# Altium PCB Micromouse_1_2.PcbDoc (part 2 of 2)
Units mm, origin at the board's own origin, x right, y up, seen from the top; angles counter-clockwise.
Board outline 75.15 x 101.5 mm, 2 copper layers (Top Layer, Bottom Layer); 116 components, 82 nets, 352 pads, 175 vias.
Unrouted connection lines stored in the file: 17.
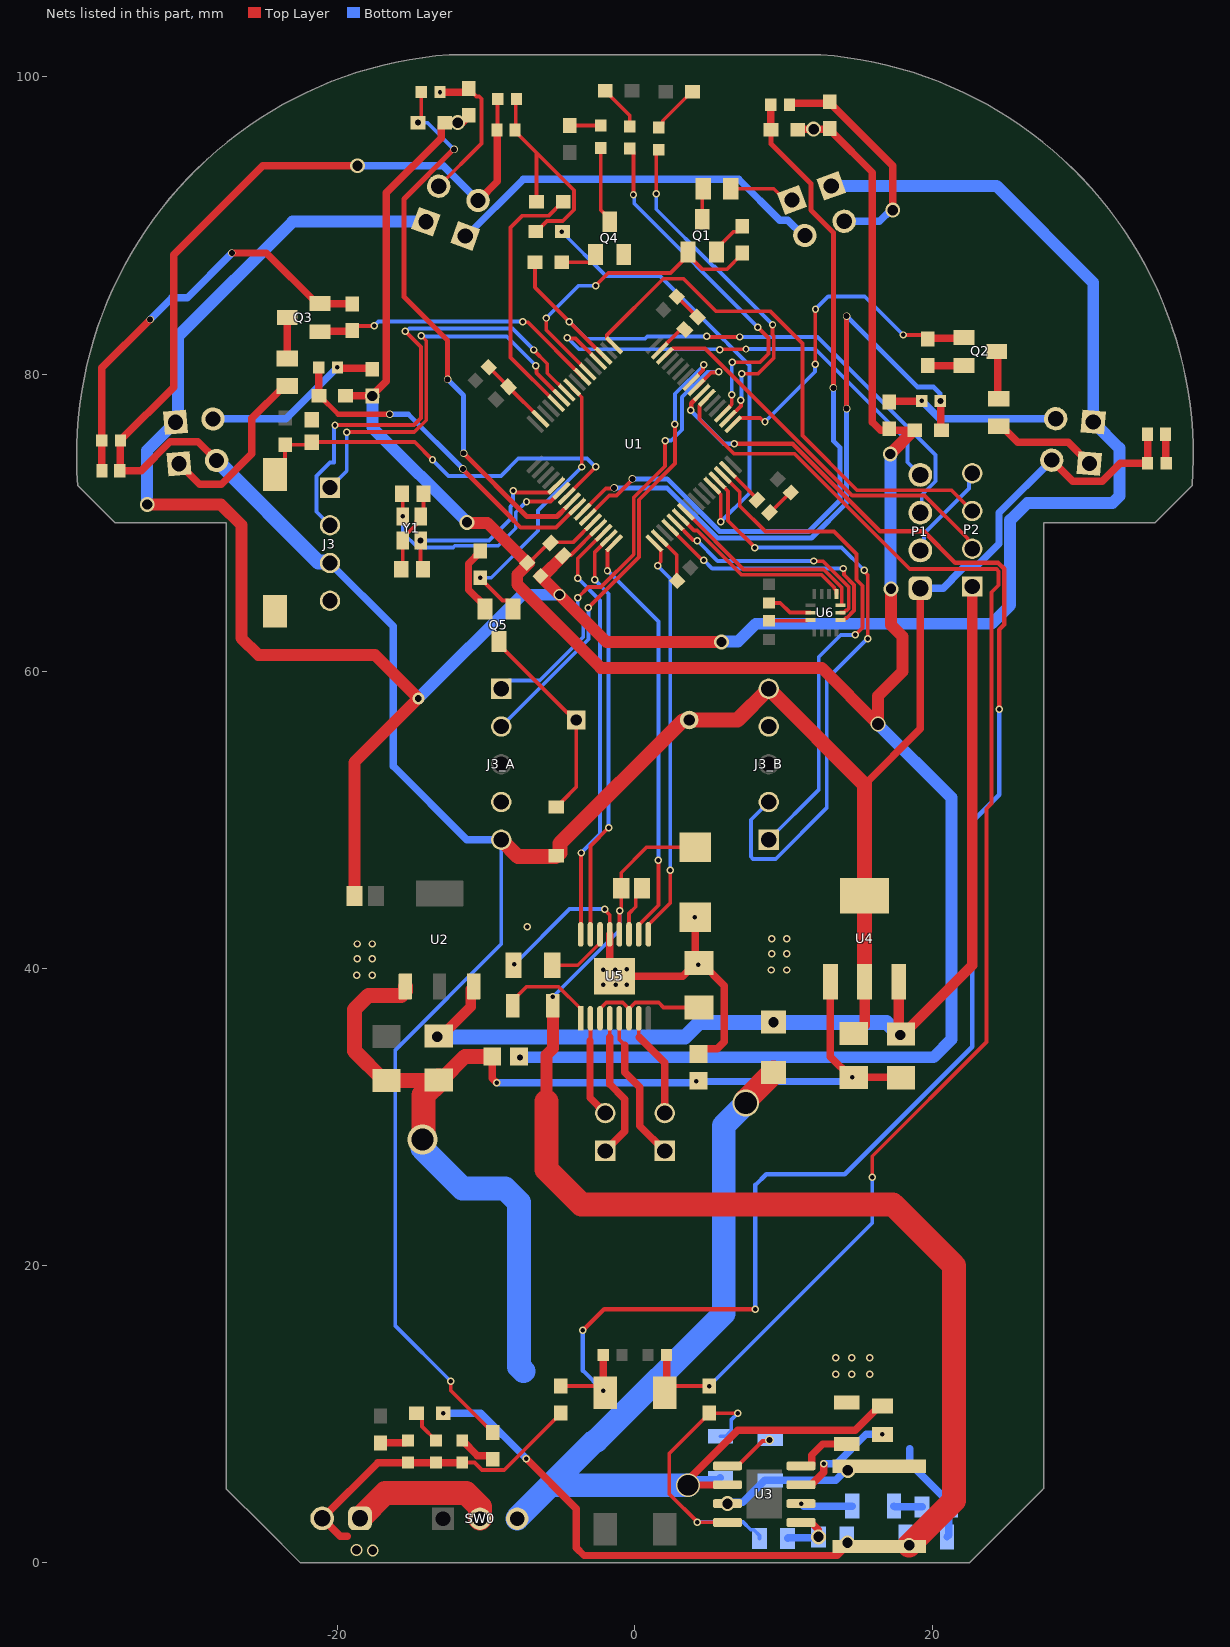
[diagram p2: the nets of this part, all layers, seen from the top]

## Via types
v1: diameter 0.5, hole 0.3, Top Layer to Bottom Layer, 117 vias
v2: diameter 1, hole 0.7, Top Layer to Bottom Layer, 19 vias
v3: diameter 0.5, hole 0.4, Top Layer to Bottom Layer, 16 vias
v4: diameter 2, hole 2, Top Layer to Bottom Layer, 11 vias
v5: diameter 0.8, hole 0.6, Top Layer to Bottom Layer, 3 vias
v6: diameter 2, hole 1.5, Top Layer to Bottom Layer, 2 vias
v7: diameter 0.7, hole 0.4, Top Layer to Bottom Layer, 1 vias
v8: diameter 1, hole 0.8, Top Layer to Bottom Layer, 1 vias
v9: diameter 0.8, hole 0.45, Top Layer to Bottom Layer, 1 vias
v10: diameter 1.8, hole 1.5, Top Layer to Bottom Layer, 1 vias
v11: diameter 0.6, hole 0.4, Top Layer to Bottom Layer, 1 vias
v12: diameter 1.6, hole 1.4, Top Layer to Bottom Layer, 1 vias
v13: diameter 2/2 (per signal layer), hole 2, Top Layer to Bottom Layer, 1 vias

## Nets (pads, with @x,y where several pads share a name; then routed paths per layer and width w, separated by ;. In a path a pad name is that pad's centre, name@x,y a point inside that pad or via, vN(x,y) a via of type N, cw(c..) or ccw(c..) an arc to the next point about the centre after c; other vN are vias at no path point) (continued)
5V: C24.1 C_IR1.1 C_IR2.1 C_IR3.1 C_IR4.1 C_IR5.1 C_IR6.1 D4.1 J3.03 J3_A.05 J3_B.05 L_IR.2 LF_IR.2 LS1.2 P1.1 R3.2 RF_IR.2 U4.2 U4.4 | length 223.6
  Top Layer w0.254: v1(-12.4,12.225) -12.4,11.6 R3.2@-9.575,8.775 ; C_IR1.1@-9.275,96.425 -9.252,96.448 -9.252,98.477 C_IR2.1@-9.229,98.5
  Top Layer w0.5: LF_IR.2@-28.152,74.193 -29.409,75.45 -31.287,75.45 -33.237,73.5 C_IR6.1@-34.675,73.5 -34.65,73.525 -34.65,75.5 C_IR5.1@-34.625,75.525 -34.625,75.552 -31.05,79.127 -31.05,88.025 -25.05,94.025 v2(-18.675,94.025) ; L_IR.2@-10.556,91.679 -9.275,92.96 C_IR1.1@-9.275,96.425 ; 15.45,52.375 19.2,56.125 P1.1@19.2,65.595 ; RF_IR.2@28.048,74.209 29.47,72.788 31.437,72.788 32.649,74 C_IR4.1@34.496,74 34.498,74.002 34.498,75.948 C_IR3.1@34.5,75.95
  Top Layer w0.7: C24.1@14.725,35.626 14.901,35.626 15.45,36.175 U4.2@15.45,39.1
  Top Layer w1: J3_A.05@-9,48.665 -7.878,47.543 D4.1@-5.347,47.543 ; D4.1@-5.23,47.59 -5.04,47.78 -5.04,48.419 3.218,56.677 3.602,56.677 LS1.2@3.65,56.725 6.9,56.725 J3_B.05@9,58.825 15.45,52.375 U4.4@15.45,44.9 U4.2@15.45,39.1
  Bottom Layer w0.254: v1(-12.4,12.225) -16.125,15.95 -16.125,34.525 -9,41.65 J3_A.05@-9,48.665
  Bottom Layer w0.5: J3.03@-20.525,67.285 -16.275,63.035 -16.275,53.625 -11.315,48.665 J3_A.05@-9,48.665 ; v2(-18.675,94.025) -12.903,94.025 L_IR.2@-10.556,91.679 ; P1.1@19.2,65.595 20.75,65.595 21.31,66.155 21.31,66.185 22.128,67.003 22.917,67.003 24.5,68.586 24.5,70.661 RF_IR.2@28.048,74.209
  Bottom Layer w1: LF_IR.2@-28.152,74.193 -21.315,67.356 -20.596,67.356 J3.03@-20.525,67.285
AGND: C10.2 C22.2 R15.1 R_HP1.2 R_HP2.2 R_HP3.2 R_HP4.2 R_IR7.1 R_IR8.1 R_IR9.1 R_IR10.1 U1.12 | length 176.2
  Top Layer w0.254: C10.2@-7.125,67.3 -5.8,68.625 C22.2@-5.675,68.625 ; C22.2@-5.622,68.678 -4.172,68.678 U1.12@-2.822,70.028
  Top Layer w0.5: R_HP4.2@-19.475,78.55 -19.462,78.537 -17.687,78.537 v2(-17.675,78.525) -17.675,78.575 -16.725,79.525 -16.725,92.21 -13.05,95.885 -13.05,96.725 -12.85,96.925 v2(-11.925,96.925) -11.625,96.925 -11.175,97.375 R_IR9.1@-11.175,97.425 ; R_HP2.2@10.95,96.45 10.987,96.488 v2(12.025,96.488) 13.087,96.488 13.3,96.275 13.3,96.25 15.982,93.568 15.982,76.768 16.525,76.225 R_HP1.2@18.825,76.225
  Top Layer w0.8: v2(-11.3,70.025) -11.262,69.987 -9.937,69.987 C10.2@-7.25,67.3 ; R15.1@-7.8,34.075 v3(-7.75,34.025) ; C10.2@-7.125,67.3 -7.919,66.506 -7.919,65.844 -2.307,60.232 12.568,60.232 v8(16.35,56.45) 16.35,58.327 18,59.977 18,62.349 17.227,63.122 v2(17.227,65.547) ; v2(17.175,74.625) R_HP1.2@18.775,76.225
  Bottom Layer w0.8: v2(-17.675,78.525) -17.675,76.4 v2(-11.3,70.025) ; v3(-7.75,34.025) 20.1,34.025 21.3,35.225 21.3,51.5 v8(16.35,56.45) ; v2(17.175,74.625) 17.201,74.599 17.201,65.573 v2(17.227,65.547)
BUZZER: Q5.1 R_BUZZ.2 U1.57 | length 19.5
  Top Layer w0.254: R_BUZZ.2@-10.4,66.25 -8.923,64.773 -8.573,64.773 -8.2,64.4 Q5.1@-8.2,64.2 ; U1.57@-4.236,79.108 -4.236,79.089 -3.587,78.44 v1(-3.587,73.748)
  Bottom Layer w0.254: v1(-10.4,66.3) -9.675,66.3 -6.517,69.458 -6.517,70.818 v1(-3.587,73.748)
CS: U1.20 U6.12 | length 17.1
  Top Layer w0.254: U1.20@2.368,69.675 2.368,69.656 2.846,69.179 2.846,69.168 4.495,67.518 4.596,67.518 v1(4.643,67.471) ; U6.12@13.825,63.45 14.034,63.45 14.179,63.596 14.255,63.596 14.743,64.084 14.743,65.817 14.068,66.492 14.068,66.872 v1(14.021,66.919)
  Bottom Layer w0.254: v1(4.643,67.471) 5.194,66.919 v1(14.021,66.919)
DBL_1: D5.1 U1.35 | length 24.1
  Top Layer w0.254: D5.1@-0.35,95.175 -0.1,94.925 v1(-0.1,92.075) ; U1.35@5.904,77.34 5.904,77.358 6.511,77.965 v1(6.511,78.614) ; v1(6.546,80.793) 6.554,80.802 8.417,80.802 8.988,81.373 8.988,82.431 v1(8.253,83.166)
  Bottom Layer w0.254: v1(-0.1,92.075) -0.053,92.028 -0.053,91.472 v1(8.253,83.166) ; v1(6.511,78.614) 6.511,80.758 v1(6.546,80.793)
DBL_2: D6.1 U1.34 | length 23.4
  Top Layer w0.254: v1(1.434,92.138) 1.434,94.934 D6.1@1.6,95.1 ; U1.34@6.257,76.986 7.127,77.856 v1(7.127,78.253) ; v1(7.2,80.025) 8.29,80.025 9.342,81.078 9.342,82.577 9.257,82.662 v1(9.257,83.337)
  Bottom Layer w0.254: v1(1.434,92.138) 1.434,91.089 5.287,87.237 5.357,87.237 v1(9.257,83.337) ; v1(7.127,78.253) 7.163,78.29 7.163,79.988 v1(7.2,80.025)
DEBUG_1: C_DB1.2 DEBUG_1.1 R_BT1.2 U1.38 | length 94.7
  Top Layer w0.254: DEBUG_1.1@2,11.445 2.455,11.9 v1(5,11.9) ; U1.38@4.843,78.4 4.843,78.382 4.335,77.874 4.335,76.962 6.657,74.64 10.744,74.64 18.496,66.888 24.324,66.888 24.473,66.739 24.473,65.792 24,65.319 24,51.098 23.65,50.747 23.65,35.05 15.97,27.37 v1(15.97,25.958)
  Top Layer w0.5: DEBUG_1.1@2,11.445 2.127,11.572 C_DB1.2@2.127,14
  Bottom Layer w0.254: v1(5,11.9) 15.97,22.87 v1(15.97,25.958)
DEBUG_2: C_DB2.2 DEBUG_2.1 R_BT2.2 U1.39 | length 108.6
  Top Layer w0.254: R_BT2.2@-5,11.9 -2.455,11.9 v1(-2.127,11.572)
  Top Layer w0.3: v1(-3.5,15.65) -2.081,17.069 v1(8.093,17.069) ; v1(3.745,77.555) 3.783,77.594 3.783,78.033 U1.39@4.083,78.333 ; v1(6.675,75.3) 10.617,75.3 16.495,69.422 19.434,69.422 21.541,67.315 24.43,67.315 24.85,66.895 24.85,63.151 24.51,62.811 v1@24.51,57.459
  Top Layer w0.5: v1(-2.127,11.572) C_DB2.2@-2.127,14
  Bottom Layer w0.3: v1(-3.5,15.65) -3.5,12.945 v1(-2.127,11.572) ; v1(3.745,77.555) 5.975,75.325 6.65,75.325 v1(6.675,75.3) ; v1(8.093,17.069) 8.108,17.084 8.108,25.433 8.825,26.15 14.125,26.15 22.7,34.725 22.7,49.875 24.524,51.699 v1(24.524,57.445)
GND: C1.1 C2.1 C3.2 C4.2 C5.2 C6.2 C7.2 C8.2 C9.2 C11.2 C12.2 C13.2 C16.2 C17.2 C18.2 C23.2 C24.2 C_IR1.2 C_IR2.2 C_IR3.2 C_IR4.2 C_IR5.2 C_IR6.2 C_MPU1.2 C_MPU2.2 D1.1 D3.1 D13.1 J3.04 J3_A.04 J3_B.04 P1.2 P2.04 P3.2 Q1.2 Q2.2 Q3.2 Q4.2 Q5.2 R5.1 R7.1 R14.2 R15.2 R_BT1.1 R_BT2.1 R_BUZZ.1 R_IR1.1 R_IR2.1 R_IR3.1 RB0.2 RB1.1 RST.2 U1.18 U1.63 U2.1 U3.4 U4.1 U6.6 U6.7 Y1.2 Y1.4 | length 213.6
  Top Layer w0.254: C1.1@-15.725,66.875 -15.625,66.975 Y1.4@-15.625,68.8 -15.625,68.975 -14.723,69.877 -14.723,70.127 Y1.2@-14.425,70.425 -14.225,70.625 C2.1@-14.225,71.95 ; D1.1@-11.625,6.75 -10.8,6.75 -10.298,6.248 -8.802,6.248 -5,10.05 R_BT2.1@-5,10.1 ; C6.2@-9.826,80.462 -8.513,79.149 C11.2@-8.501,79.149 -8.501,79.139 -6.357,76.995 U1.63@-6.357,76.986 ; C_IR2.2@-7.975,98.5 -8.025,98.45 -8.025,96.475 C_IR1.2@-8.075,96.425 -8.075,96.35 -6.625,94.9 ; RB1.1@-6.675,89.6 -6.625,89.6 -5.929,90.296 -4.858,90.296 -4.098,91.056 -4.098,92.373 -6.625,94.9 ; RB0.2@-6.625,91.6 -6.625,94.9 ; U1.18@1.661,68.968 2.819,67.81 2.819,66.107 C9.2@2.838,66.088 ; C7.2@2.812,85.212 2.824,85.212 4.187,83.849 C5.2@4.199,83.849 ; Q1.2@5.475,88.225 5.475,88.425 6.627,89.577 6.902,89.577 7.225,89.9 R_IR1.1@7.225,89.95 ; U3.4@6.225,2.72 6.21,2.735 4.215,2.735 v1(4.2,2.75) 2.3,4.65 2.3,7.35 5,10.05 R_BT1.1@5,10.1 5.025,10.075 v1(6.925,10.075) ; C_MPU2.2@9.025,63.4 11.541,63.4 11.591,63.45 U6.7@11.8,63.45 ; C_MPU1.2@9.025,64.6 9.773,64.6 10.423,63.95 U6.6@11.8,63.95 ; C4.2@9.049,70.676 9.087,70.676 10.449,72.038 C8.2@10.487,72.038
  Top Layer w0.5: C_IR6.2@-35.875,73.5 -35.875,80.425 v3(-32.625,83.675) ; v3(-27.125,88.15) -24.8,88.15 -21.4,84.75 Q3.2@-21.2,84.75 -21.188,84.738 -19.037,84.738 R_IR3.1@-19.025,84.725 ; -19.372,1.792 -19.837,1.792 P3.2@-21.045,3 -17.295,6.75 D3.1@-15.275,6.75 D13.1@-13.4,6.75 D1.1@-11.625,6.75 ; R_BUZZ.1@-10.4,68.1 -10.4,68.05 -11.2,67.25 -11.2,65.5 -10.1,64.4 Q5.2@-10.1,64.2 ; R15.2@-9.6,34.075 -9.6,32.6 v1(-9.3,32.3) ; U4.1@13.15,39.1 13.15,34.073 14.549,32.674 C24.2@14.725,32.674 17.875,32.674 C23.2@17.9,32.649 ; R_IR2.1@19.7,80.575 Q2.2@22.15,80.575 ; C_IR3.2@35.7,75.95 35.725,75.925 35.725,74.025 C_IR4.2@35.75,74
  Top Layer w1: U2.1@-15.45,38.8 -15.45,38.475 -15.731,38.194 -17.931,38.194 -18.875,37.25 -18.875,34.448 -16.901,32.474 C18.2@-16.725,32.474 C17.2@-13.225,32.474 ; C17.2@-13.024,32.499 -11.448,34.075 R15.2@-9.6,34.075
  Top Layer w1.6: v6(-14.3,28.5) -14.223,28.577 -14.223,31.476 C17.2@-13.225,32.474
  Bottom Layer w0.254: v1(4.2,2.75) 7.275,2.75 7.798,2.227 7.999,2.227 8.375,1.851 R7.1@8.375,1.65 ; C12.2@5.75,8.525 6.125,8.525 6.473,8.873 6.473,9.623 v1(6.925,10.075) ; P1.2@19.2,68.135 19.458,68.393 19.458,69.271 22.486,72.3 22.486,73.116 P2.04@22.7,73.33
  Bottom Layer w0.5: v3(-32.625,83.675) -31.175,85.125 -30.125,85.125 -27.125,88.125 v3(-27.125,88.15) ; v1(-9.3,32.3) 4.037,32.3 v1(4.136,32.398) 14.361,32.398 v1(14.637,32.674) ; 18.5,7.7 18.5,6.702 21.226,3.976 R5.1@21.226,3.775 21.113,3.662 21.113,1.863 C16.2@21,1.75
  Bottom Layer w1.6: v6(-14.3,28.5) -14.3,27.9 -11.6,25.2 -8.737,25.2 -7.8,24.263 -7.8,13.2 -7.5,12.9
  other v1: 13.5,12.7 14.6,12.7 15.8,12.7 13.5,13.8 14.6,13.8 15.8,13.8 -18.718,39.552 -17.692,39.552 9.174,39.9 10.2,39.9 -18.692,40.652 -17.692,40.652 9.2,41 10.2,41 -18.692,41.652 -17.692,41.652 9.2,42 10.2,42
  other v5: -17.647,0.827 -18.743,0.862
IN1: U1.14 U5.16 | length 28.9
  Top Layer w0.254: v1(-3.85,66.275) -3.85,67.586 U1.14@-2.115,69.321 ; U5.16@-3.65,42.3 -3.637,42.313 -3.637,47.763 v1(-3.625,47.775)
  Bottom Layer w0.254: v1(-3.85,66.275) -2.35,64.775 -2.35,49.05 v1(-3.625,47.775)
IN2: U1.15 U5.15 | length 27.9
  Top Layer w0.254: U5.15@-3,42.3 -3,48.25 v1(-1.775,49.475) ; v1(-2.7,66.15) -2.7,68.029 U1.15@-1.761,68.968
  Bottom Layer w0.254: v1(-2.7,66.15) -1.775,65.225 v1(-1.775,49.475)
IN3: U1.16 U5.10 | length 28.5
  Top Layer w0.254: v1(-1.85,66.775) -1.85,68.153 -1.828,68.175 -1.828,68.193 U1.16@-1.408,68.614 ; U5.10@0.25,42.3 0.25,42.938 1.575,44.263 v1(1.575,47.3)
  Bottom Layer w0.254: v1(-1.85,66.775) 1.575,63.35 v1(1.575,47.3)
IN4: U1.17 U5.9 | length 27.5
  Top Layer w0.254: U5.9@0.9,42.3 0.9,42.938 2.375,44.413 v1(2.375,46.6) ; U1.17@1.308,68.614 1.728,68.193 1.728,67.37 1.525,67.167 v1(1.525,67.1)
  Bottom Layer w0.254: v1(1.525,67.1) 2.375,66.25 v1(2.375,46.6)
L_IR: C_HP3.1 R_HP3.1 U1.8 | length 37.8
  Top Layer w0.254: v3(-14.6,96.925) -14.375,97.15 C_HP3.1@-14.375,98.975
  Top Layer w0.34: v3(-12.606,79.642) -12.606,82.256 -15.55,85.2 -15.55,91.792 -12.217,95.125 v3(-12.175,95.125) ; v3(-11.525,74.675) -7.275,70.425 -5.245,70.425 U1.8@-4.631,71.039
  Bottom Layer w0.254: v3(-14.6,96.925) -14.594,96.919 -13.969,96.919 v3(-12.175,95.125)
  Bottom Layer w0.34: v3(-12.606,79.642) -11.525,78.561 v3(-11.525,74.675)
L_RV: C_HP3.2 L_RV.2 R_IR9.2 | length 10.3
  Top Layer w0.254: L_RV.2@-13.205,92.644 -10.325,95.525 -10.325,98.525 -10.474,98.674 -10.674,98.674 -11.175,99.175 R_IR9.2@-11.175,99.225
  Top Layer w0.5: v1(-13.121,98.975) -11.375,98.975 R_IR9.2@-11.175,99.175
LF_EM: Q3.1 R_IR3.2 U1.55 | length 19.5
  Top Layer w0.254: R_IR3.2@-19.025,82.925 -18.706,83.244 v1(-17.559,83.244) ; v1(-7.543,83.536) -7.496,83.489 -7.204,83.489 U1.55@-3.529,79.815
  Top Layer w0.5: Q3.1@-21.2,82.85 -21.163,82.887 -19.062,82.887 R_IR3.2@-19.025,82.925
  Bottom Layer w0.254: v1(-17.559,83.244) -17.267,83.536 v1(-7.543,83.536)
LF_IR: C_HP4.1 R_HP4.1 U1.9 | length 23.6
  Top Layer w0.254: -8.165,70.147 -7.693,69.675 -5.315,69.675 -3.901,71.089 U1.9@-3.883,71.089
  Top Layer w0.34: R_HP4.1@-21.275,78.55 -21.225,78.55 -19.975,77.3 v3(-16.5,77.3) ; v3(-11.575,73.625) -11.575,73.582 -11.495,73.502 -11.495,73.496 -8.165,70.166
  Top Layer w0.5: R_HP4.1@-21.275,78.55 C_HP4.1@-21.275,80.45
  Bottom Layer w0.34: v3(-16.5,77.3) -15.25,77.3 v3(-11.575,73.625)
LF_RV: C_HP4.2 LF_RV.2 R_IR10.2 | length 12.2
  Top Layer w0.5: v1(-20.021,80.45) -19.959,80.387 -17.737,80.387 R_IR10.2@-17.675,80.325
  Bottom Layer w0.5: LF_RV.2@-28.396,76.982 -23.489,76.982 v1(-20.021,80.45)
LR_EM: Q1.1 R_IR1.2 U1.54 | length 20.8
  Top Layer w0.254: v1(-5.975,83.775) -5.975,82.968 U1.54@-3.175,80.168 ; v1(-2.648,85.951) -1.799,86.8 2.387,86.8 3.202,87.615 3.202,87.652 3.538,87.988 Q1.1@3.575,87.988 ; Q1.1@3.575,88.225 3.575,88.025 4.55,87.05 6.175,87.05 7.225,88.1 R_IR1.2@7.225,88.15
  Bottom Layer w0.254: v1(-5.975,83.775) -3.799,85.951 v1(-2.648,85.951)
MGND: C19.1 C21.2 R12.2 R14.1 U5.13 U5.17 | length 29.9
  Top Layer w0.254: C21.2@-8.175,40.225 v1(-8.125,40.275) ; v1(-2.025,44) -2.025,43.933 -1.7,43.608 U5.13@-1.7,42.3
  Top Layer w0.5: U5.13@-1.7,42.3 -1.7,39.8 U5.17@-1.375,39.475 3.225,39.475 4.125,40.375 R12.2@4.3,40.375 ; C19.1@4.05,43.44 4.05,40.625 R12.2@4.3,40.375 ; R14.1@4.275,34.25 4.625,34.6 5.525,34.6 6,35.075 6,38.85 4.475,40.375 R12.2@4.3,40.375
  Bottom Layer w0.254: v1(-8.125,40.275) -4.4,44 v1(-2.025,44)
  other v1: -2.133,38.903 -1.3,38.92 -0.544,38.903 -2.133,39.924 -1.317,39.92 -0.545,39.935 4.273,40.254 -7.247,42.802 4.009,43.465
MISO: U1.22 U6.1 | length 12.8
  Top Layer w0.254: U1.22@3.075,70.382 3.982,69.475 4.189,69.475 7.166,66.498 12.56,66.498 13.414,65.644 13.414,65.569 13.563,65.421 U6.1@13.563,65.212
MOSI: U1.23 U6.14 | length 13.9
  Top Layer w0.254: U1.23@3.429,70.735 7.312,66.852 12.707,66.852 13.916,65.643 13.916,64.452 13.915,64.45 U6.14@13.825,64.45
NetC1_2: C1.2 U1.5 Y1.1 | length 13.8
  Top Layer w0.254: v3(-14.425,68.8) -14.425,67.025 C1.2@-14.275,66.875 ; v1(-8.2,72.15) -8.133,72.15 -8.009,72.025 -5.793,72.025 -5.736,72.082 -5.717,72.082 U1.5@-5.297,72.503
  Bottom Layer w0.254: v3(-14.425,68.8) -9.823,68.8 -8.372,70.25 -8.372,71.081 -8.2,71.253 v1(-8.2,72.15)
NetC2_2: C2.2 U1.6 Y1.3 | length 16
  Top Layer w0.254: C2.2@-15.675,71.95 -15.625,71.9 v1(-15.625,70.425) ; v1(-7.3,71.425) -5.686,71.425 -4.962,72.15 U1.6@-4.943,72.15
  Bottom Layer w0.254: v1(-15.625,70.425) -15.625,69.325 -14.623,68.323 -12.247,68.323 -12.124,68.446 -9.201,68.446 -8.018,69.629 -8.018,70.707 v1(-7.3,71.425)
NetC3_1: C3.1 R1.2 RST.1 U1.7 | length 27.7
  Top Layer w0.254: RST.1@-24.225,73.245 -24.225,73.545 -23.55,74.22 R1.2@-23.55,75.25 ; R1.2@-23.525,75.25 -21.925,75.25 C3.1@-21.75,75.425 -14.825,75.425 v1(-13.625,74.225) ; U1.7@-4.59,71.796 -2.653,73.733 v1(-2.653,73.754)
  Bottom Layer w0.254: v1(-13.625,74.225) -12.548,73.148 -9.023,73.148 -7.851,74.32 -3.219,74.32 v1(-2.653,73.754)
NetC4_1: C4.1 U1.31 | length 2.8
  Top Layer w0.254: U1.31@6.257,73.564 8.2,71.621 C4.1@8.2,71.525
NetC5_1: C5.1 U1.47 | length 2.3
  Top Layer w0.254: U1.47@1.661,81.582 3.079,83 C5.1@3.35,83
NetC13_1: C13.1 U3.8 | length 4.1
  Top Layer w0.5: U3.8@11.175,6.53 11.86,6.53 11.91,6.58 11.91,7.26 12.65,8 C13.1@14.25,8
NetC14_1: C14.1 U3.6 | length 3.5
  Bottom Layer w0.5: v1(11.175,3.99) 11.34,3.825 C14.1@14.625,3.825
NetC14_2: C14.2 R5.2 | length 1.9
  Bottom Layer w0.5: C14.2@17.425,3.825 17.475,3.775 R5.2@19.324,3.775
NetC15_1: C15.1 U3.1 | length 3.5
  Top Layer w0.254: U3.1@6.225,6.53 6.91,6.53 8.589,8.209 8.984,8.209 v11(9.05,8.275)
NetC15_2: C15.2 L3.1 U3.3 | length 9
  Bottom Layer w0.5: v2(6.225,3.99) 6.321,4.086 7.261,4.086 8.725,5.55 C15.2@9.1,5.55 13.515,5.55 14.19,6.225 v2(14.325,6.225)
NetC20_2: C20.2 U5.11 | length 3.5
  Top Layer w0.254: U5.11@-0.4,42.3 -0.4,43.698 0.052,44.15 0.052,44.977 C20.2@0.475,45.4
NetC21_1: C21.1 U5.14 | length 4.4
  Top Layer w0.254: C21.1@-5.575,40.225 -3.848,40.225 -2.473,41.6 -2.448,41.6 -2.35,41.697 U5.14@-2.35,42.3
NetD1_2: D1.2 R3.1 | length 2.6
  Top Layer w0.5: D1.2@-11.625,8.25 -10.6,7.225 -9.775,7.225 -9.575,7.025 R3.1@-9.575,6.975
NetD3_2: D3.2 R10.1 | length 1.9
  Top Layer w0.5: R10.1@-17.125,8.075 -15.45,8.075 D3.2@-15.275,8.25
NetD4_2: D4.2 LS1.1 Q5.3 | length 14
  Top Layer w0.254: Q5.3@-9.15,62 -9.15,61.8 -4.573,57.223 -4.448,57.223 LS1.1@-3.95,56.725 -3.95,52.21 -4.917,51.243 -4.917,51.173 -5.23,50.86 D4.2@-5.3,50.86
NetD5_2: D5.2 R_DBL1.1 | length 3.1
  Top Layer w0.254: R_DBL1.1@-2.075,99.075 -2.025,99.075 -0.35,97.4 D5.2@-0.35,96.675
NetD6_2: D6.2 R_DBL2.1 | length 3.4
  Top Layer w0.254: D6.2@1.6,96.6 1.873,96.873 1.873,97.048 3.825,99 R_DBL2.1@3.875,99
NetD13_2: D13.2 R13.1 | length 2.4
  Top Layer w0.254: R13.1@-14.7,10.075 -14.65,10.075 -14.327,9.752 -14.327,9.177 D13.2@-13.4,8.25
NetL_IR_1: L_IR.1 R_IR.2 | length 26
  Bottom Layer w0.5: L_IR.1@-11.425,89.292 -11.338,89.292 -7.53,93.1 7,93.1 9.736,90.364 10.291,90.364 11.322,89.334 R_IR.2@11.432,89.334
NetLED_TX_2: LED_TX.2 R_TX2.1 | length 2.1
  Top Layer w0.254: R_TX2.1@-4.4,96.725 LED_TX.2@-2.3,96.725
NetLF_IR_1: LF_IR.1 R_IR6.2 | length 12
  Top Layer w0.5: LF_IR.1@-30.682,73.972 -29.286,72.575 -27.849,72.575 -25.778,74.645 -25.778,77.022 -23.6,79.2 R_IR6.2@-23.4,79.2
NetP3_1: P3.1 SW0.2 | length 10
  Top Layer w1.6: P3.1@-18.505,3 -16.805,4.7 -11.362,4.7 -10.425,3.763 SW0.2@-10.425,2.975
NetQ1_3: Q1.3 R_IR4.1 | length 2.1
  Top Layer w0.254: Q1.3@4.525,90.425 4.525,92.4 R_IR4.1@4.6,92.475
NetQ2_3: Q2.3 R_IR5.1 | length 3.2
  Top Layer w0.5: Q2.3@24.35,81.525 24.412,81.463 24.412,78.413 R_IR5.1@24.475,78.35
NetQ3_3: Q3.3 R_IR6.1 | length 2.8
  Top Layer w0.5: R_IR6.1@-23.4,81.05 Q3.3@-23.4,83.8
NetQ4_1: Q4.1 R_TX1.2 | length 2.6
  Top Layer w0.254: R_TX1.2@-4.925,87.525 -3.023,87.525 -2.65,87.898 Q4.1@-2.65,88.05
NetR7_2: R7.2 R8.2 U3.5 | length 4
  Top Layer w0.5: U3.5@11.175,2.72 11.86,2.72 12.349,2.231 v2(12.349,1.75)
  Bottom Layer w0.5: R7.2@10.277,1.65 10.327,1.7 12.299,1.7 v2(12.349,1.75)
NetR11_2: R11.2 U5.1 | length 6.6
  Top Layer w0.254: R11.2@-8.225,37.5 -8.225,37.85 -7.3,38.775 -5.138,38.775 -3.65,37.287 U5.1@-3.65,36.65
NetR12_1: R12.1 U5.3 U5.6 | length 8.6
  Top Layer w0.254: U5.3@-2.35,36.65 -2.35,37.287 -1.933,37.704 -0.817,37.704 U5.6@-0.4,37.287 ; U5.6@-0.4,36.65 U5.6@-0.4,37.287 ; R12.1@4.3,37.375 1.929,37.375 1.6,37.704 0.017,37.704 U5.6@-0.4,37.287
NetR33_2: R33.2 U3.7 | length 7.2
  Top Layer w0.5: U3.7@11.175,5.26 11.86,5.26 12.7,6.1 v1(12.7,6.675)
  Bottom Layer w0.5: v1(12.7,6.675) 13.573,6.675 15.547,8.649 v1(16.65,8.649)
NetR_IR4_2: R_IR4.2 R_IR.1 | length 4.4
  Top Layer w0.254: R_IR4.2@6.45,92.475 9.346,92.475 10.1,91.72 R_IR.1@10.563,91.72
NetR_IR5_2: R_IR5.2 RF_IR.1 | length 7.1
  Top Layer w0.5: R_IR5.2@24.475,76.5 24.675,76.5 25.768,75.407 29.16,75.407 RF_IR.1@30.578,73.988
NetRB0_1: RB0.1 U1.60 | length 17.4
  Top Layer w0.254: U1.60@-5.297,78.047 -8.375,81.125 -8.375,89.875 -7.6,90.65 -5.825,90.65 -4.875,91.6 RB0.1@-4.825,91.6
OUT1: J1.01 U5.4 | length 9.9
  Top Layer w0.254: -1.7,35.375 U5.4@-1.7,36.65
  Top Layer w0.5: J1.01@-2,27.73 -0.675,29.055 -0.675,31.2 -1.7,32.225 -1.7,35.375
OUT2: J1.02 U5.2 | length 6.8
  Top Layer w0.254: -3.025,35.15 -3,35.175 U5.2@-3,36.65
  Top Layer w0.5: -3.025,35.15 -3.025,31.295 J1.02@-2,30.27
OUT3: J2.01 U5.5 | length 10.2
  Top Layer w0.254: U5.5@-1.05,36.65 -1.05,35.2 -0.7,34.85
  Top Layer w0.5: -0.7,34.85 -0.7,33.025 0.325,32 0.325,29.405 J2.01@2,27.73
OUT4: J2.02 U5.7 | length 7.1
  Top Layer w0.254: U5.7@0.25,36.65 0.25,35.4 0.275,35.375
  Top Layer w0.5: 0.275,35.375 2,33.65 J2.02@2,30.27
PB2: RB1.2 U1.28 | length 30.4
  Top Layer w0.254: v1(-4.925,89.575) -4.9,89.6 RB1.2@-4.875,89.6 ; U1.28@5.197,72.503 5.197,72.485 5.775,71.906 v1(5.775,70.075)
  Bottom Layer w0.254: v1(-4.925,89.575) -1.95,86.6 1.675,86.6 5.948,82.327 5.973,82.327 6.252,82.048 6.252,82.023 7.703,80.572 7.703,71.978 5.8,70.075 v1(5.775,70.075)
R_IR: C_HP2.1 R_HP2.1 U1.11 | length 48.9
  Top Layer w0.254: U1.11@-3.175,70.382 -1.729,71.828 -1.247,71.828 -0.175,72.9 v3(-0.175,72.95)
  Top Layer w0.34: R_HP2.1@9.148,96.452 9.148,95.502 11.839,92.811 11.839,91.034 13.35,89.523 v3(13.35,79.075)
  Top Layer w0.5: C_HP2.1@9.146,98.125 9.148,98.123 R_HP2.1@9.148,96.452
  Bottom Layer w0.34: v3(-0.175,72.95) 2.165,72.95 5.7,69.415 11.693,69.415 13.81,71.532 13.81,75.052 13.35,75.512 v3(13.35,79.075)
R_RV: C_HP2.2 R_IR8.2 R_RV.2 | length 15.4
  Top Layer w0.5: C_HP2.2@10.4,98.125 10.5,98.225 13,98.225 R_IR8.2@13.1,98.325 13.1,98.275 17.35,94.025 17.35,91.041 v2(17.345,91.036)
  Bottom Layer w0.5: R_RV.2@14.082,90.284 16.457,90.284 17.209,91.036 v2(17.345,91.036)
RF_EM: Q2.1 R_IR2.2 U1.33 | length 23
  Top Layer w0.254: U1.33@6.611,76.633 7.032,77.053 8.426,77.053 8.685,76.794 v1(8.752,76.794) ; v1(12.122,80.678) 12.136,80.692 12.136,84.361 v1(12.15,84.375) ; v1(18.059,82.634) 19.441,82.634 R_IR2.2@19.7,82.375
  Top Layer w0.5: R_IR2.2@19.7,82.375 19.75,82.425 22.1,82.425 Q2.1@22.15,82.475
  Bottom Layer w0.254: v1(8.752,76.794) 12.122,80.164 v1(12.122,80.678) ; v1(12.15,84.375) 13,85.225 15.468,85.225 v1(18.059,82.634)
RF_IR: C_HP1.1 R_HP1.1 U1.10 | length 44.3
  Top Layer w0.254: U1.10@-3.529,70.735 -1.961,72.303 -1.447,72.303 v3(-1.4,72.35)
  Top Layer w0.34: v3(14.25,77.675) v3(14.25,83.9)
  Top Layer w0.5: v3(20.55,78.2) 20.588,78.163 20.588,76.263 R_HP1.1@20.625,76.225
  Bottom Layer w0.34: v3(-1.4,72.35) 2.142,72.35 5.517,68.975 11.875,68.975 14.25,71.35 v3(14.25,77.675) ; v3(14.25,83.9) 19.025,79.125 20.1,79.125 20.519,78.706 20.519,78.231 v3(20.55,78.2)
RF_RV: C_HP1.2 R_IR7.2 RF_RV.2 | length 11.7
  Top Layer w0.5: R_IR7.2@17.1,78.125 17.137,78.163 19.259,78.163 v1(19.296,78.2)
  Bottom Layer w0.5: v1(19.296,78.2) 20.497,76.999 RF_RV.2@28.313,76.999
RX: P1.4 U1.52 | length 31.2
  Top Layer w0.254: v1(-4.55,82.45) -4.503,82.403 -3.996,82.403 U1.52@-2.468,80.875 ; v1(5.714,81.648) 5.734,81.668 7.453,81.668 v1(7.473,81.689)
  Bottom Layer w0.254: v1(-4.55,82.45) -3.775,81.675 5.687,81.675 v1(5.714,81.648) ; v1(7.473,81.689) 12.136,81.689 18.346,75.479 18.346,74.069 P1.4@19.2,73.215
SCK: U1.21 U6.13 | length 15.6
  Top Layer w0.254: U1.21@2.722,70.028 3.912,68.838 4.151,68.838 v1(4.198,68.791) ; v1(12.025,67.425) 12.046,67.404 12.656,67.404 14.389,65.67 14.389,64.231 14.257,64.098 14.181,64.098 14.034,63.95 U6.13@13.825,63.95
  Bottom Layer w0.254: v1(4.198,68.791) 5.564,67.425 v1(12.025,67.425)
SCL_enA: J3_A.02 U1.41 | length 31.5
  Top Layer w0.254: v1(-3.133,64.289) 0.275,67.697 0.275,71.55 2.7,73.975 2.7,76.607 v1(2.682,76.625) ; U1.41@3.783,79.461 4.578,80.256 4.578,80.578 v1(4.625,80.625)
  Bottom Layer w0.254: J3_A.02@-9,56.285 -3.133,62.152 v1(-3.133,64.289) ; v1(2.682,76.625) 2.7,76.643 2.7,78.675 4.625,80.6 v1(4.625,80.625)
SCL_enB: J3_B.02 U1.29 | length 41.6
  Top Layer w0.254: U1.29@5.55,72.857 5.55,72.838 6.27,72.119 6.27,70.13 v1(8.075,68.325) ; v1(15.425,66.8) 15.425,66.733 15.658,66.5 v1(15.658,62.204)
  Bottom Layer w0.254: v1(8.075,68.325) 13.9,68.325 v1(15.425,66.8) ; J3_B.02@9,51.205 7.8,50.005 7.8,47.524 7.949,47.375 9.475,47.375 12.9,50.8 12.9,59.446 v1(15.658,62.204)
SCL_LED: J3.02 U1.58 | length 33.1
  Top Layer w0.254: v1(-20.186,76.545) -20.154,76.577 -14.874,76.577 -14.404,77.047 -14.404,81.829 v1(-15.45,82.875) ; v1(-6.825,81.625) -5.899,80.699 -5.899,80.063 U1.58@-4.59,78.754
  Bottom Layer w0.254: J3.02@-20.525,69.825 -21.437,70.737 -21.437,73.144 -20.531,74.05 -20.25,74.05 -20.25,76.481 v1(-20.186,76.545) ; v1(-15.45,82.875) -15.383,82.875 -15.194,83.064 -8.242,83.064 v1@-6.825,81.648
SDA_enA: J3_A.01 U1.40 | length 32
  Top Layer w0.254: v1(-3.846,64.956) -3.129,65.673 -2.277,65.673 -0.079,67.871 -0.079,71.697 2.025,73.801 v1(2.025,75.525) ; U1.40@4.136,79.108 5.132,80.103 5.578,80.103 v1(5.625,80.15)
  Bottom Layer w0.254: J3_A.01@-9,58.825 -8.442,59.383 -6.403,59.383 -3.487,62.298 -3.487,63.415 -3.846,63.773 v1(-3.846,64.956) ; v1(2.025,75.525) 2.042,75.542 2.446,75.542 3.159,76.254 3.159,78.45 4.859,80.15 v1(5.625,80.15)
SDA_enB: J3_B.01 U1.30 | length 34.3
  Top Layer w0.254: U1.30@5.904,73.21 7.05,72.064 7.05,71.125 8.775,69.4 13.4,69.4 14.9,67.9 14.9,66.161 15.304,65.757 15.304,62.929 v1(14.825,62.45)
  Bottom Layer w0.254: J3_B.01@9,48.665 12.375,52.04 12.375,60.975 13.85,62.45 v1(14.825,62.45)
SDA_LED: J3.01 U1.59 | length 27.1
  Top Layer w0.254: v1(-19.4,76.1) -14.85,76.1 -14.05,76.9 -14.05,82.25 v1(-14.387,82.587) ; v1(-6.675,80.575) -6.628,80.528 -6.628,80.085 U1.59@-4.943,78.4
  Bottom Layer w0.254: J3.01@-20.525,72.365 -19.4,73.49 v1(-19.4,76.1) ; v1(-14.387,82.587) -14.34,82.54 -14.166,82.54 -14.16,82.534 -8.634,82.534 v1(-6.675,80.575)
SWCLK: P2.03 U1.49 | length 37.1
  Top Layer w0.254: U1.49@-1.428,81.938 -1.828,82.338 -1.828,82.375 -1.879,82.425 -1.879,82.636 1.901,86.415 3.264,86.415 5.441,84.238 9.095,84.238 11.273,82.06 11.273,75.859 14.944,72.188 21.302,72.188 P2.03@22.7,70.79
SWDIO: P2.02 U1.46 | length 26.7
  Top Layer w0.254: U1.46@2.015,81.229 2.033,81.229 2.535,81.731 4.719,81.731 14.616,71.834 19.493,71.834 22.389,68.938 22.389,68.863 22.7,68.552 P2.02@22.7,68.25
TX: P1.3 R_TX1.1 U1.51 | length 41
  Top Layer w0.254: R_TX1.1@-6.725,87.525 -6.725,85.839 U1.51@-2.115,81.229 ; v1(4.825,82.537) 4.862,82.5 v1(7.05,82.5)
  Bottom Layer w0.254: v1(-4.42,83.534) -3.261,82.375 0.668,82.375 0.83,82.537 v1(4.825,82.537) ; v1(7.05,82.5) 12.275,82.5 20.227,74.548 20.227,72.79 19.293,71.856 19.293,70.768 P1.3@19.2,70.675
TX_LED: LED_TX.1 Q4.3 | length 5.2
  Top Layer w0.254: LED_TX.1@-2.3,95.225 -2.3,91.05 -1.7,90.45 Q4.3@-1.7,90.25
V_ST: C17.1 C23.1 D2.2 P2.01 U2.3 U4.3 | length 72
  Top Layer w0.7: C17.1@-13.024,35.451 -11.05,37.425 -11.05,38.6 U2.3@-10.85,38.8 ; U4.3@17.75,39.1 17.75,35.751 C23.1@17.9,35.601 ; v2(17.85,35.525) 18,35.525 22.7,40.225 P2.01@22.7,65.71
  Bottom Layer w1: v2(-13.3,35.4) 3.375,35.4 4.35,36.375 v2(9.325,36.375) 16.919,36.375 17.769,35.525 v2(17.85,35.525)
VA3.3: C10.1 C22.1 FB1.2 L_RV.1 LF_RV.1 R_RV.1 RF_RV.1 U1.13 | length 176.6
  Top Layer w0.254: v5(-5.075,65.15) v5@-5.075,65.298 ; C22.1@-4.773,67.83 -4.314,67.83 U1.13@-2.468,69.675
  Top Layer w0.8: v2(-32.825,71.225) -27.863,71.225 -26.489,69.851 -26.489,62.239 -25.35,61.1 -17.5,61.1 v9(-14.575,58.175) -18.876,53.874 FB1.2@-18.876,44.875 ; C22.1@-4.826,67.776 -6.19,66.413 -6.334,66.413 -6.344,66.403 -6.353,66.403 C10.1@-6.363,66.413 -5.1,65.15 v5(-5.075,65.15) -5.075,65.125 -1.925,61.975 v2(5.825,61.975)
  Bottom Layer w0.8: v2(-32.825,71.225) -32.825,74.862 LF_RV.1@-30.926,76.761 -30.75,76.937 -30.75,82.55 -23.042,90.258 L_RV.1@-14.074,90.258 ; v9(-14.575,58.175) -7.6,65.15 v5(-5.075,65.15) ; v2(5.825,61.975) 5.863,62.013 6.938,62.013 8.125,63.2 24,63.2 25.25,64.45 25.25,70.175 26.4,71.325 32.131,71.325 32.6,71.794 32.6,75.021 RF_RV.1@30.844,76.777 30.844,86.156 24.33,92.67 R_RV.1@13.213,92.67
VIN74: C12.1 D2.1 R33.1 SW0.3 U3.2 | length 67
  Top Layer w0.5: U3.2@6.225,5.26 6.208,5.243 3.592,5.243 v12(3.575,5.225) 3.722,5.372 3.722,5.719 6.928,8.925 14.823,8.925 16.449,10.551 R33.1@16.65,10.551
  Top Layer w1.6: v10(7.45,30.95) 7.488,30.988 7.488,31.163 D2.1@9.325,33
  Bottom Layer w0.5: v12(3.575,5.225) 3.783,5.225 4.15,5.592 5.617,5.592 C12.1@5.75,5.725
  Bottom Layer w1.6: SW0.3@-7.925,2.975 -2.675,8.225 -2.575,8.225 5.975,16.775 5.975,29.425 7.45,30.9 v10(7.45,30.95) ; -5.675,5.225 v12(3.575,5.225)
VM: C16.1 C19.2 C20.1 L3.2 R8.1 R11.1 R13.2 U5.12 | length 111.9
  Top Layer w0.254: U5.12@-1.05,42.3 -1.037,42.313 -1.037,43.863 v1(-1.025,43.875) -1.025,43.942 -0.925,44.042 C20.1@-0.925,45.4 -0.925,46.45 0.785,48.16 C19.2@4.05,48.16
  Top Layer w0.5: v1(-7.315,7.023) -3.95,3.658 -3.95,1.022 -3.428,0.5 13.625,0.5 L3.2@14.3,1.175
  Top Layer w0.8: -5.95,31.05 -5.95,34.188 -5.525,34.613 R11.1@-5.525,37.5
  Top Layer w1.6: -5.95,31.05 -5.95,26.475 -3.6,24.125 17.35,24.125 21.475,20 21.475,4.2 v2(18.45,1.175)
  Bottom Layer w0.254: v1(-5.525,38.1) -1.025,42.6 v1(-1.025,43.875)
  Bottom Layer w0.5: v1(-12.9,10.075) -10.367,10.075 v1(-7.315,7.023)
  other v2: 14.3,1.35
pads on no net: J3_A.03 J3_B.03 SW0.1 U1.2 U1.3 U1.4 U1.24 U1.25 U1.26 U1.27 U1.36 U1.37 U1.42 U1.43 U1.44 U1.45 U1.50 U1.53 U1.56 U1.61 U1.62 U3.9 U5.8 U6.2 U6.3 U6.4 U6.9 U6.10 U6.11
copper on no net:
  other v4: -25,9.5 25,9.5 -10.5,11.5 10.5,11.5 -10.5,20.75 10.5,20.75 -10.5,30 10.5,30 22.5,31.25 -25,46.5 25,46.5
  other v13: -22.5,31.25

## Polygon pours and split planes (outlines as drawn)
GND on Top Layer "GND_L01_P007" (solid, pour order 7): 10.21,49.875 20.075,49.875 19.84,49.64 19.84,30.204 13.315,30.204 10.4,33.118 10.4,37.556 10.441,37.597 10.172,37.866 8.526,37.866 8.526,49.6 8.196,49.929
GND on Top Layer "GND_L01_P006" (solid, pour order 6): -20.167,50.371 -7.149,50.371 -6.986,50.534 -6.986,46.249 -7.126,46.249 -9.478,43.897 -9.431,43.851 -9.431,31.672 -9.664,31.439 -9.757,31.532 -19.817,31.532
GND on Top Layer "GND_L01_P005" (solid, pour order 5): -27.406,70.017 -27.386,69.997 27.475,69.997 27.475,48.325 27.329,48.471 -27.422,48.471
MGND on Top Layer "MGND_L01_P001" (solid, pour order 1): -8.95,46.8 8,46.8 7.625,46.425 7.625,33.3 -3.188,33.3 -9.015,39.127
GND on Top Layer "GND_L01_P003" (solid, pour order 3): -19.85,14.05 -19.8,14 19.9,14 19.9,0.258 19.899,0.258 19.857,0.3 -20,0.3
GND on Bottom Layer "GND_L02_P009" (solid, pour order 9): 7.1,52.2 22.3,52.2 22.2,52.1 22.2,48.9 20,48.9 19.8,48.7 19.9,48.6 19.9,30.3 12.3,30.3 11.2,31.4 11.2,38.4 10,38.4 8.8,39.6
GND on Bottom Layer "GND_L02_P008" (solid, pour order 8): -20.2,52.3 -7.3,52.3 -7.3,44.8 -7.1,44.6 -7.2,44.5 -10,44.5 -10,33 -11.5,31.5 -20.1,31.5
MGND on Bottom Layer "MGND_L02_P002" (solid, pour order 2): -8.525,43.95 7.475,43.95 7.475,33.425 7.15,33.75 -5.55,33.75 -8.65,36.85
GND on Bottom Layer "GND_L02_P004" (solid, pour order 4): -19.9,14 -19.8,14.1 19.9,14.1 19.9,0.214 19.901,0.213 19.888,0.2 -20,0.2

## Silkscreen, mask and mechanical layers (free items; w line width, h text height)
Top Overlay:
  lines w0.3: -33.228,77.488 -34.1,87.45 -27.127,88.06 -26.255,78.098 ; -15.697,88.502 -25.094,91.922 -22.7,98.5 -13.303,95.08 ; 13.328,95.08 22.725,98.5 25.119,91.922 15.722,88.502 ; 26.255,78.098 27.127,88.06 34.1,87.45 33.228,77.488
Mechanical 1:
  lines w0.3: -27.45,62.65 -20,62.65 -20,4.5 ; -26.825,4.325 -22.5,0 0,0 22.325,0 26.825,4.5 20,4.5 20,62.675 27.35,62.675 ; -26.825,4.5 -19.975,4.5 ; -20,30 -10.5,30 10.5,30 19.925,30 ; -20,47.3 -7.7,47.3 ; -19.95,11.5 -10.5,11.5 10.5,11.5 19.9,11.5 ; -19.95,60.2 -7.625,60.2 ; 7.625,47.3 19.975,47.3 ; 7.65,60.2 19.9,60.2